# Altium PCB HW1PCB1.PcbDoc
Units mm, origin at the board's own origin, x right, y up, seen from the top; angles counter-clockwise.
Board outline 50.04 x 50.93 mm, 2 copper layers (Top Layer, Bottom Layer); 28 components, 19 nets, 123 pads, 13 vias.
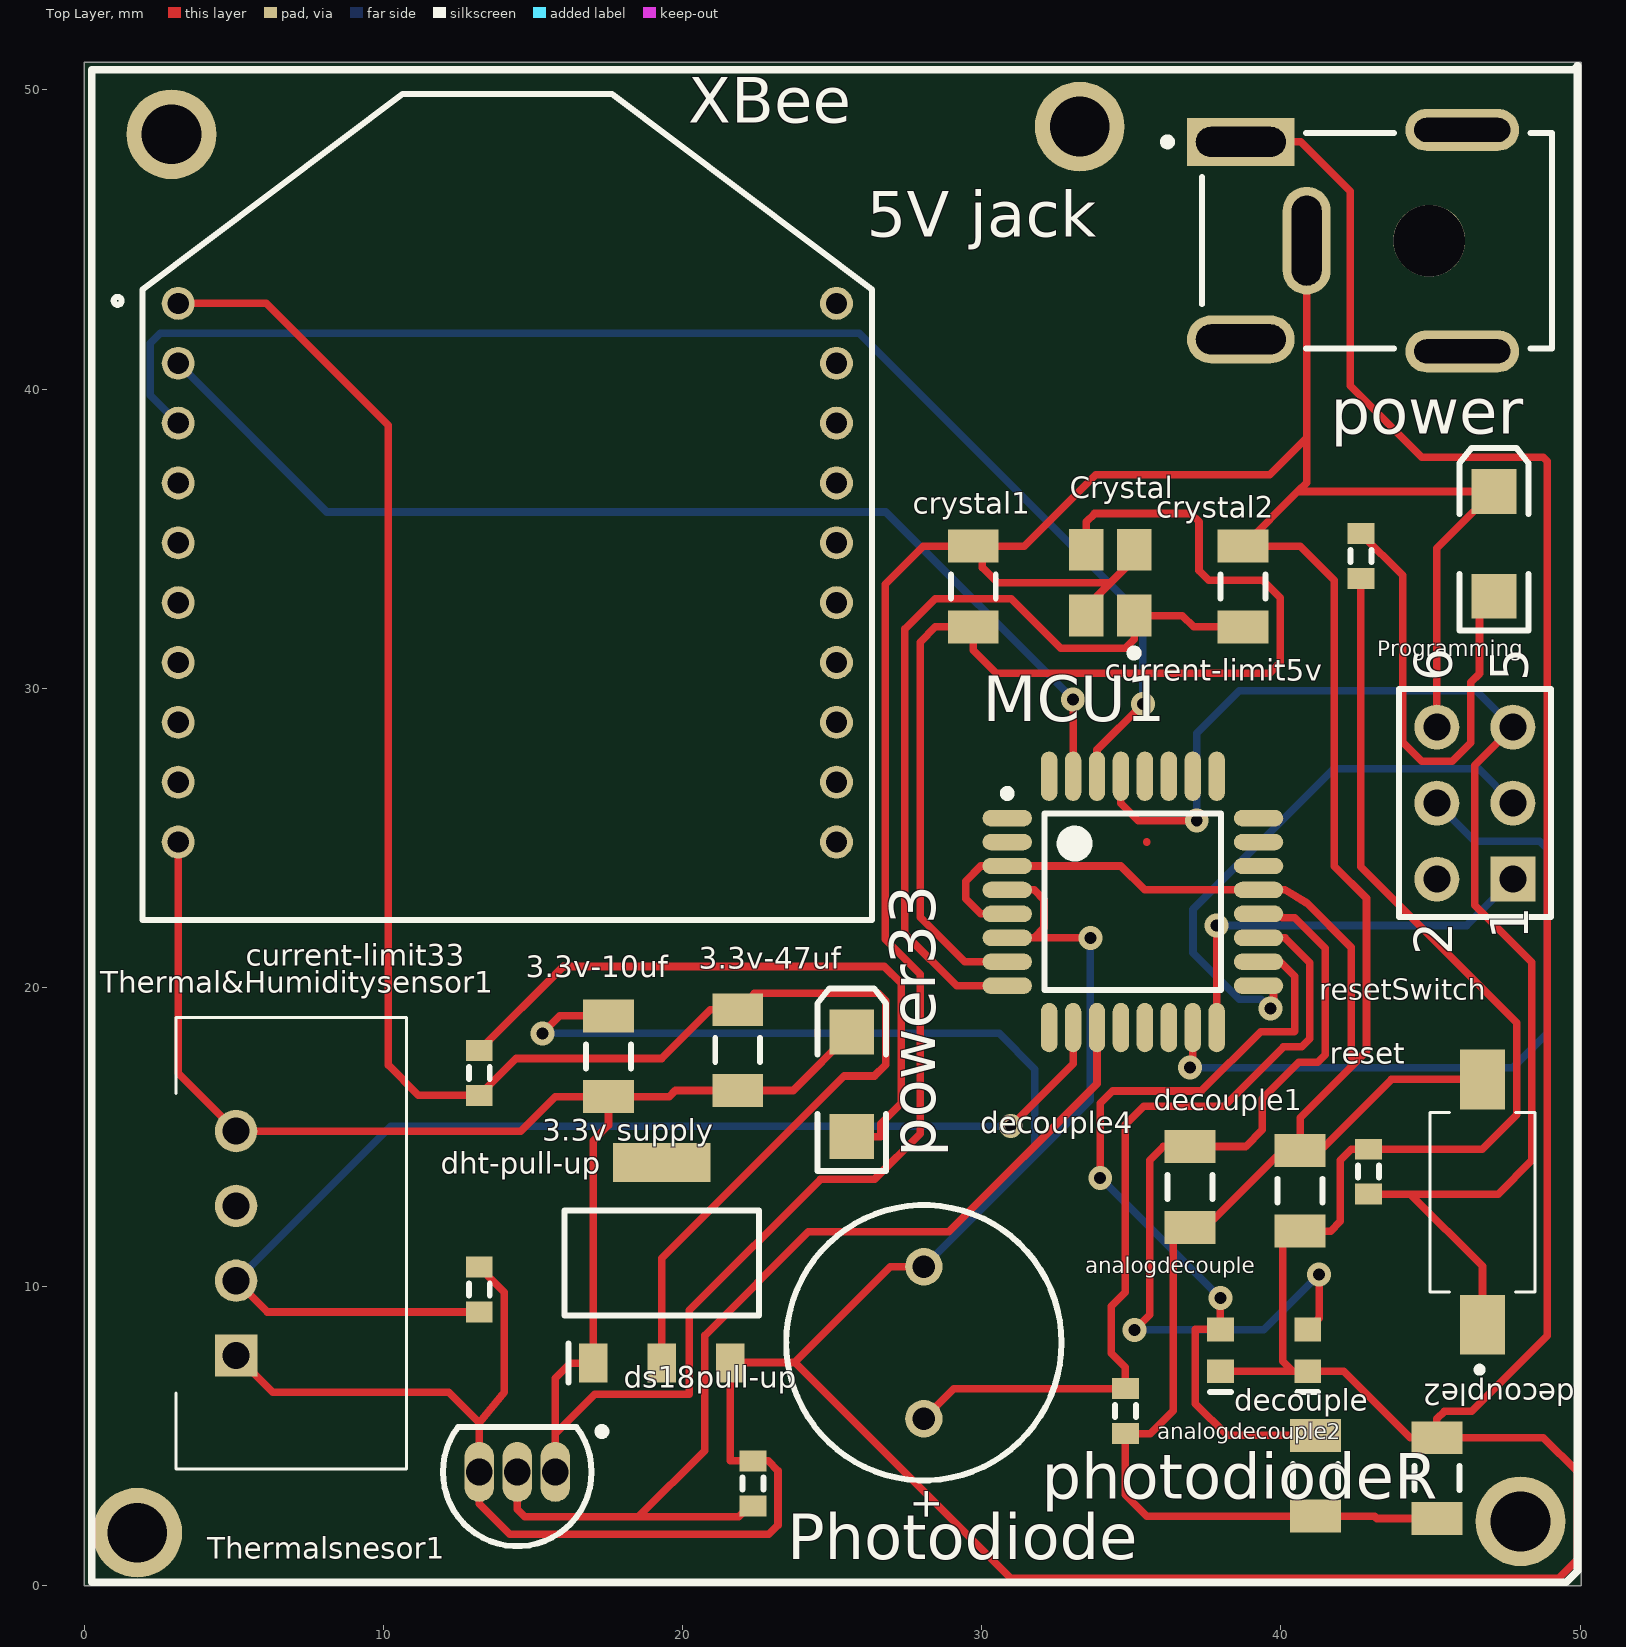
[diagram p0: Top Layer view]
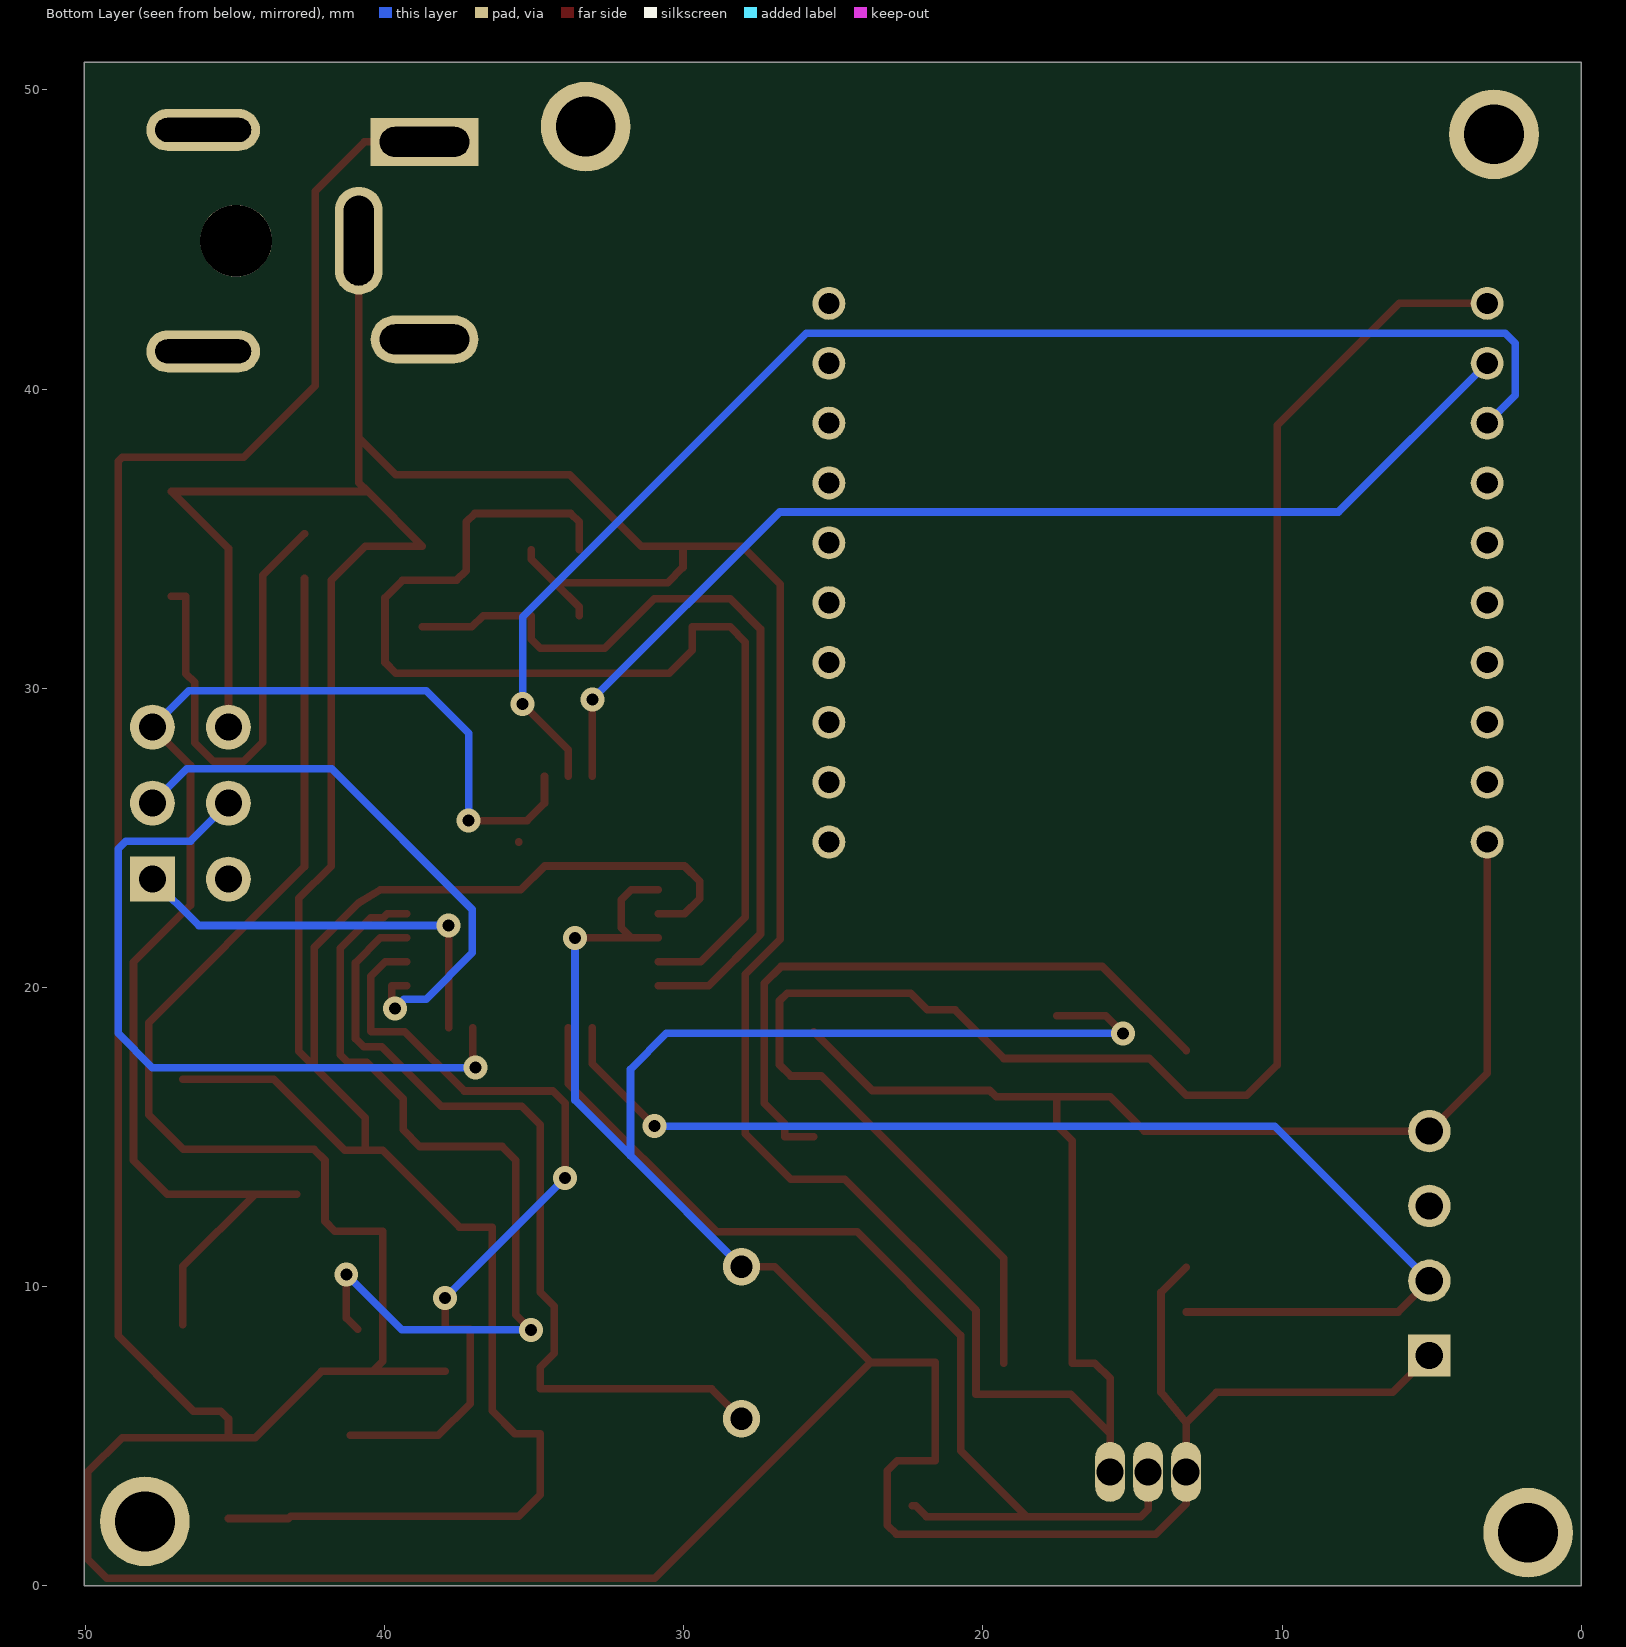
[diagram p1: Bottom Layer view, seen from below]

## Layer stack, top to bottom
Top Solder: solder mask 0.0102, Solder Resist, Dk 3.5
Top Layer: signal copper 0.0356
Dielectric 1: dielectric 0.32, FR-4, Dk 4.8
Bottom Layer: signal copper 0.0356
Bottom Solder: solder mask 0.0102, Solder Resist, Dk 3.5

## Board outline
0,0 0,50.927 50.038,50.927 50.038,50.419 50.038,49.53 50.038,0

## Design rules (kind name [scope] priority, off if disabled: settings)
Clearance [All] p1: gap=0.254 ignorepadtopadclearanceinfootprint=FALSE except(0: Arc-Hole Track-Hole SMDPad-Hole THPad-Hole Via-Hole Fill-Hole Poly-Hole Region-Hole Text-Hole; 0.1: SMDPad-SMDPad)
PolygonConnect [All] p1: connectstyle=Relief reliefconductorwidth=0.254 reliefentries=4 polygonreliefangle="90 Angle" airgapwidth=0.254
RoomDefinition HW1 [InComponentClass('HW1')] p1: confinementstyle=ConfineIn formatcopy=TRUE lockcomponents=FALSE outline 0,0.254 50.038,0.254 50.038,50.8 0,50.8
RoutingVias [All] p1: holewidth=0.4 width=0.8 viastyle="Through Hole" minholewidth=0.2 minwidth=0.4 maxholewidth=6 maxwidth=6.2
SolderMaskExpansion [All] p1: expansion=0.102 istentingtop=FALSE
Width [All] p1: maxlimit=0.254 minlimit=0.254 preferedwidth=0.254
30 further rules are at their usual default settings.

## Components (designator, comment, footprint, x,y, rotation, side; value= is the part's Value field where it differs from the comment)
"3.3v supply" "AMS1117-3.3" SOT229P700X180-4N 19.304,10.795 r90 top
3.3v-10uf "Cap Semi" C1206 17.526,17.7 r90 top value=10uF
3.3v-47uf "Cap Semi" C1206 21.844,17.907 r90 top value=47uF
"5V jack" "PJ-047A" FP-PJ-047A-MFG 43.208,44.958 r270 top
analogdecouple "Inductor" INDC1608L 37.973,7.874 r90 top value=10uH
analogdecouple2 "Inductor" INDC1608L 40.894,7.874 r90 top value=10uH
Crystal "TSX-3225 16.0000MF18X-AC3" EPSON-TSX-3225_V 34.29,33.528 r90 top
crystal1 "Cap Semi" C1206 29.718,33.401 r90 top value=22uF
crystal2 "Cap Semi" C1206 38.735,33.401 r90 top value=22uF
current-limit5v "Res3" J1-0603 42.672,34.417 r90 top value=330
current-limit33 "Res3" J1-0603 13.208,17.145 r90 top value=330
decouple "" C1206 41.148,3.683 r90 top value=100nF
decouple1 "" C1206 40.64,13.208 r90 top value=100nF
decouple2 "" C1206 45.212,3.603 r270 top value=100nF
decouple4 "" C1206 36.957,13.335 r90 top value=100nF
dht-pull-up "Res3" J1-0603 13.208,9.906 r90 top value=10K
ds18pull-up "Res3" J1-0603 22.352,3.429 r90 top value=4.7K
MCU1 "ATmega328P-AU" 32A_N 35.052,22.86 r0 top
Photodiode "BPW21R" VISH-BPW21R-2 28.067,8.128 r90 top
photodiodeR "Res3" J1-0603 34.798,5.842 r90 top value=10K
power "LED2" 3.2X1.6X1.1 47.117,34.826 r90 top
power33 "LED2" 3.2X1.6X1.1 25.654,16.764 r90 top
Programming "Header 3X2" HDR2X3 47.752,23.622 r90 top
reset "Res3" J1-0603 42.926,13.843 r90 top value=10K
resetSwitch "PTS636_SK43_SMTR_LFS" PTS636SK43SMTRLFS 46.736,12.827 r90 top
Thermal&Humiditysensor1 "DHT22" DHT22 5.08,7.7 r90 top
Thermalsnesor1 "DS18B20+" Q3+1 14.478,3.81 r90 top
XBee "XB24CZ7PIT-004" XB24CAPIT-001 14.146,49.861 r0 top

## Footprints (in the part's own frame and the unit in brackets; to place one, negate y for a bottom-side part, rotate by r counter-clockwise, add the part's x,y. Pads: shape width x height; smd on the part's side, far side on the other; paste and mask are expansions set on the pad)
3.2X1.6X1.1 [mm] "SMT LED; 2 Flat Leads"
  rect 1.5x1.5 smd: 1(-1.75,0) 2(1.75,0)
  silkscreen extent -2.9,-1.15 3.2,1.15
32A_N [mm] "Thin QFP, 32-Leads, Body 7x7mm, Pitch 0.8mm, IPC Medium Density"
  oval 1.65x0.55 smd: 1(-4.2,2.8) 2(-4.2,2) 3(-4.2,1.2) 4(-4.2,0.4) 5(-4.2,-0.4) 6(-4.2,-1.2) 7(-4.2,-2) 8(-4.2,-2.8) 17(4.2,-2.8) 18(4.2,-2) 19(4.2,-1.2) 20(4.2,-0.4) 21(4.2,0.4) 22(4.2,1.2) 23(4.2,2) 24(4.2,2.8)
  oval 0.55x1.65 smd: 9(-2.8,-4.2) 10(-2,-4.2) 11(-1.2,-4.2) 12(-0.4,-4.2) 13(0.4,-4.2) 14(1.2,-4.2) 15(2,-4.2) 16(2.8,-4.2) 25(2.8,4.2) 26(2,4.2) 27(1.2,4.2) 28(0.4,4.2) 29(-0.4,4.2) 30(-1.2,4.2) 31(-2,4.2) 32(-2.8,4.2)
  silkscreen extent -4.32,-2.95 2.95,3.75, body extent -3.5,-3.5 3.5,3.5, height 1.2
C1206 [mm] "Chip Capacitor, Body 3.2x1.6mm, IPC High Density"
  rect 1.1x1.7 smd: 1(-1.35,0) 2(1.35,0)
  silkscreen extent -0.4,-0.75 0.4,0.75, body extent -1.7,-0.9 1.7,0.9, height 1.3
DHT22 [mm]
  rect 1.416x1.416 hole 0.91: 1(0,0)
  round 1.416 hole 0.91: 2(2.5,0) 3(5,0) 4(7.5,0)
  silkscreen extent -3.8,-5.7 11.3,2, body extent -3.8,-5.7 11.3,2, height 25.2
EPSON-TSX-3225_V [mm] "SMD, 4-Leads, Body 3.2x2.5mm"
  rect 1.4x1.15 smd: 1(-1.1,-0.8) 2(1.1,-0.8) 3(1.1,0.8) 4(-1.1,0.8)
  silkscreen extent -2.47,-0.93 -2.23,-0.68, body extent -1.6,-1.25 1.6,1.25, height 0.6
FP-PJ-047A-MFG [mm]
  rect 1.6x3.6 hole 3 slot 1 at 0 deg paste-1000 mask+0: 1(-3.3,-4.55)
  rrect100% 3.6x1.6 hole 1 slot 3 at 0 deg paste-1000 mask+0: 2(0,-2.35)
  rrect100% 1.6x3.6 hole 3 slot 1 at 0 deg paste-1000 mask+0: 3(3.3,-4.55)
  rrect100% 1.4x3.8 hole 3.2 slot 0.8 at 0 deg paste-1000 mask+0: 4(3.7,2.85) 5(-3.7,2.85)
  round 2.4 hole 2.4 unplated paste-1000 mask+0: ""(0,1.75)
  silkscreen extent -3.6,-7.12 3.6,5.85, body extent -4.5,-6.45 4.5,5.95, height 0.25
HDR2X3 [mm] "Connector; Header; 3x2 Position"
  rect 1.5x1.5 hole 0.9: 1(0,0)
  round 1.5 hole 0.9: 2(0,2.54) 3(2.54,0) 4(2.54,2.54) 5(5.08,0) 6(5.08,2.54)
  silkscreen extent -1.27,-1.27 6.35,3.81
INDC1608L [mm] "Chip Inductor, Body 1.6x0.8mm, IPC High Density"
  rect 0.8x0.9 smd: 1(-0.7,0) 2(0.7,0)
  silkscreen extent -1.4,-0.35 -1.4,0.35, body extent -0.87,-0.48 0.87,0.48, height 0.55
J1-0603 [mm] "Chip Resistor, Body 1.6x0.8mm, IPC High Density"
  rect 0.7x0.9 smd: 1(-0.75,0) 2(0.75,0)
  silkscreen extent -0.2,-0.35 0.2,0.35, body extent -0.85,-0.48 0.85,0.48, height 0.9
PTS636SK43SMTRLFS [mm]
  rect 2x1.5 smd: 1(-4.1,0) 2(4.1,0)
  silkscreen extent -5.7,-1.75 3,1.75
Q3+1 [mm] "TO, Flat Index; 3 In-Line, Axial Leads; Body Dia. 4.7mm; Leads 0.56 x 0.51 mm (max)"
  oval 2x1 hole 0.9: 1(0,-1.27) 2(0,0) 3(0,1.27)
  silkscreen extent -2.48,-2.96 1.5,2.48, body extent -2.48,-2.5 1.5,2.5, height 4.96
SOT229P700X180-4N [mm]
  rect 1.3x0.95 smd: 1(-3.35,2.29) 2(-3.35,0) 3(-3.35,-2.29)
  rect 1.3x3.25 smd: 4(3.35,0)
  silkscreen extent -4,-3.25 1.75,3.25, body extent -3.5,-3.25 3.5,3.25, height 1.8
VISH-BPW21R-2 [mm] "THD, 2-Leads, Dia 9.2mm, Height 3.3mm, Pin Spacing 5.08mm"
  round 1.25 hole 0.75: 1(-2.54,0) 2(2.54,0)
  silkscreen extent -4.6,-4.6 4.6,4.6, body extent -4.6,-4.6 4.6,4.6, height 3.3
XB24CAPIT-001 [mm]
  round 1.1 hole 0.71: 1(-11,-7) 2(-11,-9) 3(-11,-11) 4(-11,-13) 5(-11,-15) 6(-11,-17) 7(-11,-19) 8(-11,-21) 9(-11,-23) 10(-11,-25) 11(11,-25) 12(11,-23) 13(11,-21) 14(11,-19) 15(11,-17) 16(11,-15) 17(11,-13) 18(11,-11) 19(11,-9) 20(11,-7)
  silkscreen extent -13.16,-27.61 12.19,0

## Part data
"3.3v supply": "Integrated Circuit", Manufacturer_Name="Advanced Monolithic Systems", Datasheet Link=http://www.advanced-monolithic.com/pdf/ds1117.pdf, Height=1.8mm, Manufacturer_Part_Number=AMS1117-3.3
3.3v-10uf 3.3v-47uf crystal1 crystal2: "Capacitor (Semiconductor SIM Model)", LatestRevisionDate=29-May-2009, LatestRevisionNote="IPC-7351 Footprint Added.", PackageDescription="Chip Capacitor", PackageReference=C1206, Published=8-Jun-2000, Publisher="Altium Limited"
"5V jack": library part CMP-14830-000005-1, "CONN PWR JACK 2X5.5MM SOLDER", Current Rating=2.5A, Manufacturer="CUI Inc", Temperature="-25°C to +85°C", Temperature Range High=+85°C, Temperature Range Low=-25°C, Voltage Rating=24V, Automotive=No, Category=Conn, ComponentLink2Description=Datasheet, ComponentLink2URL=https://www.cui.com/product/resource/pj-047a.pdf, Conn Gender=Male, Conn Orientation="Right Angle", Contact Material=Tin,Nickel, Device Class L1=Connectors, Device Class L2="Power Connectors", Device Class L3=unset, Digikey Description="CONN PWR JACK 2X5.5MM SOLDER", Height=9.7mm, Lead Free=Yes, Manufacturer Part Number=PJ-047A, Mouser Description="2.0 x 6.0 mm, 2.5 A, Horizontal, Through Hole, Shielded, Dc Power Jack Connector", Number Of Contacts=3, Octopart=https://octopart.com/pj-047a-cui-19052783, Package=PJ-047A, RoHS=TRUE, Shielding=true
Crystal: library part CMP-2000-07332-1, "MHz Range Crystal Unit, 16 MHz, -40 to 85 degC, 4-Pin SMD, RoHS, Tape and Reel", Frequency=16MHz, Frequency Stability=10PPM, Load Capacitance=9pF, Manufacturer=Epson, Operating Temperature Range=-40Cto+85C, Package / Case=3.2mmx2.5mm, Package Description="4-Pin Surface Mount Device, Body 3.2 x 2.5 mm", Package Reference=TSX-3225, Brand=EpsonTiming, Datasheet URL=https://support.epson.biz/td/api/doc_check.php?dl=brief_FA-238V_en.pdf, Datasheet Version=12/2015, Drive Level=200uW, ESR=60Ohms, Factory Pack Quantity=250, Height=0.6mm, Length=3.2mm, Manufacturer URL=https://www.eea.epson.com/, Mounting Style=SMD/SMT, Mounting Technology=SurfaceMount, Packaging=Reel, Product Category=Crystals, RoHS=True, Series=TSX-3225, Termination Style=SMD/SMT, Tolerance=10PPM, Type=Crystal, Unit Weight=0.000564oz, Width=2.5mm
current-limit5v current-limit33 dht-pull-up ds18pull-up photodiodeR reset: "Resistor", LatestRevisionDate=29-May-2009, LatestRevisionNote="IPC-7351 Footprint Added.", PackageDescription="Chip Resistor", PackageReference=J1-0603, Published=8-Jun-2000, Publisher="Altium Limited"
decouple decouple1 decouple2 decouple4: library part "Cap Semi", "Capacitor (Semiconductor SIM Model)", LatestRevisionDate=29-May-2009, LatestRevisionNote="IPC-7351 Footprint Added.", PackageDescription="Chip Capacitor", PackageReference=C1206, Published=8-Jun-2000, Publisher="Altium Limited"
MCU1: library part CMP-0095-00269-2, "8-bit AVR Microcontroller, 32KB Flash, 1KB EEPROM, 2KB SRAM, 32-pin TQFP, Industrial Grade (-40°C to 85°C)", Code_JEDEC=MS-026-ABA, ComponentLink1Description="Manufacturer URL", ComponentLink1URL=http://www.atmel.com/, ComponentLink2Description="ATmega48A/48PA/88A/88PA/168A/168PA/328/328P Datasheet", ComponentLink2URL=http://www.atmel.com/dyn/resources/prod_documents/doc8271.pdf, ComponentLink3Description="ATmega48A/48PA/88A/88PA/168A/168PA/328/328P Summary", ComponentLink3URL=http://www.atmel.com/dyn/resources/prod_documents/8271S.pdf, DatasheetVersion="revD, May-2011", PackageDescription="32-Lead, 7x7x1.0 mm Body, 0.8mm Lead Pitch, Thin Profile Plastic Quad Flat Package (TQFP)", PackageReference=32A, PackageVersion="revC, Oct-2010", RevisionNote="DatasheetVersion & PackageVersion updated. URLs added."
Photodiode: library part CMP-2000-05428-1, "Silicon Photodiode, 565 nm, -40 to 125 degC, 2-Pin TO-5, RoHS, Bulk", Dark Current=2000pA, Diode Case Style=TO-5, Manufacturer=Vishay, Operating Temperature Max=125degC, Operating Temperature Min=-40degC, Angle of Half Sensitivity ±=50deg, Automotive Qualification Standard=-, Datasheet URL=https://datasheet.ciiva.com/25620/0900766b80e22c15-25620368.pdf, Datasheet Version="Rev. 1.7, 11/2011", Manufacturer URL=http://www.vishay.com/, MSL=-, No. of Pins=2Pins, Packaging=Each, Product Range=-, SVHC=ToBeAdvised, Wavelength of Peak Sensitivity=565nm
power power33: "Typical RED, GREEN, YELLOW, AMBER GaAs LED", LatestRevisionDate=17-Jul-2002, LatestRevisionNote="Re-released for DXP Platform.", PackageDescription="SM LED; 2 Flat Leads", PackageReference=3.2X1.6X1.1, PackageVersion=Feb-2002, Published=8-Jun-2000, Publisher="Altium Limited"
Programming: "Header, 3-Pin, Dual row", LatestRevisionDate=17-Jul-2002, LatestRevisionNote="Re-released for DXP Platform.", Publisher="Altium Limited"
resetSwitch: "Switch", Arrow Part Number="PTS636 SK43 SMTR LFS", Manufacturer_Name="C & K COMPONENTS", Mouser Part Number=611-PTS636SK43SMTRLF, Arrow Price/Stock=https://www.arrow.com/en/products/pts636-sk43-smtr-lfs/ck, Datasheet Link="https://componentsearchengine.com/Datasheets/1/PTS636 SK43 SMTR LFS.pdf", Height=4.5mm, Manufacturer_Part_Number="PTS636 SK43 SMTR LFS", Mouser Price/Stock=https://www.mouser.co.uk/ProductDetail/CK/PTS636-SK43-SMTR-LFS?qs=vLWxofP3U2wsQpQ593zsYw%3D%3D
Thermal&Humiditysensor1: "Integrated Circuit", Manufacturer_Name="Aosong Electronics", Datasheet Link=https://datasheet4u.com/datasheet-parts/DHT22-datasheet.php?id=792211, Height=25.1mm, Manufacturer_Part_Number=DHT22
Thermalsnesor1: library part CMP-0253-00003-1, "Programmable Resolution Digital Thermometer, 1-Wire Interface, ±0.5°C Accuracy, 3-Pin TO92, -55°C to +125°C, Pb-Free", Code_JEDEC=TO-226-AA, ComponentLink1Description="Manufacturer URL", ComponentLink1URL=http://www.maxim-ic.com, ComponentLink2Description=Datasheet, ComponentLink2URL=http://datasheets.maxim-ic.com/en/ds/DS18B20.pdf, DatasheetVersion=2007, PackageDescription="TO-92 Package, Body Dia. 4.7mm; Leads 0.51 x 0.51 mm (max), Pb-Free", PackageReference=Q3+1, PackageVersion="revB, 2009"
XBee: "Integrated Circuit", Manufacturer_Name="Digi International", Mouser Part Number=888-XB24CZ7PIT-004, Arrow Part Number=XB24CZ7PIT-004, Arrow Price/Stock=https://www.arrow.com/en/products/xb24cz7pit-004/digi-international, Datasheet Link=http://www.digi.com/pdf/ds_xbee_zigbee.pdf, Manufacturer_Part_Number=XB24CZ7PIT-004, Mouser Price/Stock=https://www.mouser.com/Search/Refine.aspx?Keyword=888-XB24CZ7PIT-004
analogdecouple analogdecouple2: Code_IEC=1005, Code_JEITA=0402, LatestRevisionDate=29-May-2009, LatestRevisionNote="IPC-7351 Footprint Added.", PackageDescription="Chip Inductor", PackageReference=0402-A, Published=8-Jun-2000, Publisher="Altium Limited"

## Free pads (board coordinates)
  round 3 hole 2: 2(2.921,48.514) 3(1.778,1.778) 4(48.006,2.159) 5(33.274,48.768)

## Via types
v1: diameter 0.8, hole 0.4, Top Layer to Bottom Layer, 13 vias

## Nets (pads, with @x,y where several pads share a name; then routed paths per layer and width w, separated by ;. In a path a pad name is that pad's centre, name@x,y a point inside that pad or via, vN(x,y) a via of type N, cw(c..) or ccw(c..) an arc to the next point about the centre after c; other vN are vias at no path point)
3.3V: 3.3v-47uf.2 "3.3v supply.2" current-limit33.1 XBee.1 | length 64.5
  Top Layer w0.254: XBee.1 6.085,42.861 10.16,38.786 10.16,17.411 11.176,16.395 current-limit33.1 14.441,17.628 19.304,17.628 20.933,19.257 3.3v-47uf.2 21.852,19.257 22.407,19.812 26.543,19.812 26.797,19.558 26.797,17.424 26.416,17.043 25.4,17.043 19.304,10.947 19.304,7.445
5V: 3.3v-10uf.2 "3.3v supply.3" "5V jack.1" analogdecouple2.1 analogdecouple.1 current-limit5v.1 decouple1.1 decouple2.1 dht-pull-up.2 ds18pull-up.2 MCU1.4 MCU1.6 Photodiode.2 reset.2 Thermal&Humiditysensor1.1 Thermalsnesor1.3 | length 218.3
  Top Layer w0.254: Thermal&Humiditysensor1.1 6.303,6.477 12.192,6.477 13.208,5.461 ; dht-pull-up.2 14.046,9.818 14.046,6.477 13.208,5.461 ; v1(15.316,18.466) 15.9,19.05 3.3v-10uf.2 ; Photodiode.2 26.949,10.668 23.749,7.468 ; MCU1.6 31.75,21.66 ; MCU1.4 31.75,23.26 32.08,22.93 32.08,21.99 31.75,21.66 ; v1(33.63,21.66) 31.75,21.66 ; analogdecouple.1 40.386,7.174 ; 38.658,48.258 40.665,48.258 42.316,46.607 42.316,40.107 44.704,37.719 48.768,37.719 48.895,37.592 48.895,8.357 46.38,5.842 45.466,5.842 45.212,5.588 decouple2.1 ; current-limit5v.1 42.672,24.028 47.879,18.821 47.879,15.748 46.724,14.593 reset.2 42.355,14.593 41.986,14.224 41.986,12.188 41.656,11.858 decouple1.1 40.056,11.858 40.056,7.504 40.386,7.174 ; 13.208,5.461 Thermalsnesor1.3 13.208,2.743 14.224,1.727 22.885,1.727 23.19,2.032 23.19,3.849 22.86,4.179 ds18pull-up.2 21.594,4.179 21.594,7.445 21.594,7.468 23.749,7.468 ; 23.749,7.468 30.963,0.254 49.276,0.254 49.911,0.889 49.911,3.81 48.768,4.953 decouple2.1 ; 40.386,7.174 analogdecouple2.1 42.102,7.174 44.323,4.953 decouple2.1
  Bottom Layer w0.254: v1(15.316,18.466) 30.582,18.466 31.775,17.272 31.775,14.376 ; Photodiode.2 31.775,14.376 ; v1(33.63,21.66) 33.63,16.231 31.775,14.376
ADC6: MCU1.19 Photodiode.1 photodiodeR.2 | length 28.3
  Top Layer w0.254: Photodiode.1 29.071,6.592 photodiodeR.2 34.798,7.303 34.322,7.779 34.322,9.341 34.798,9.817 34.798,15.418 35.414,16.034 38.104,16.034 40.085,18.015 40.693,18.015 40.966,18.288 40.966,20.828 40.134,21.66 MCU1.19
GND: 3.3v-10uf.1 3.3v-47uf.1 "3.3v supply.1" "5V jack.2" crystal1.2 crystal2.2 Crystal.2 Crystal.4 decouple1.2 decouple2.2 decouple4.1 decouple.1 MCU1.3 MCU1.5 MCU1.21 photodiodeR.1 power33.2 power.2 Programming.6 resetSwitch.2 Thermal&Humiditysensor1.4 Thermalsnesor1.1 XBee.10 | length 210.9
  Top Layer w0.254: XBee.10 3.146,17.134 Thermal&Humiditysensor1.4 14.598,15.2 15.748,16.35 3.3v-10uf.1 ; Thermalsnesor1.1 15.748,5.08 ; power33.2 23.697,16.557 3.3v-47uf.1 19.765,16.557 19.558,16.35 3.3v-10uf.1 ; MCU1.5 29.972,22.46 29.464,22.968 29.464,23.552 29.972,24.06 MCU1.3 34.646,24.06 35.446,23.26 MCU1.21 40.132,23.26 40.862,22.824 42.35,21.336 42.35,17.359 ; Crystal.4 33.49,32.715 34.303,33.528 ; Crystal.2 35.09,34.315 34.303,33.528 ; 40.858,44.958 40.858,38.369 ; decouple2.2 43.209,2.253 43.129,2.333 decouple.1 35.513,2.333 34.798,3.048 photodiodeR.1 35.636,5.092 36.398,5.854 36.398,11.985 decouple4.1 37.49,11.985 40.063,14.558 decouple1.2 ; Programming.6 45.212,34.671 power.2 40.56,36.576 ; resetSwitch.2 43.695,16.927 41.326,14.558 decouple1.2 ; 15.748,5.08 15.748,6.937 16.256,7.445 17.014,7.445 17.014,14.88 17.526,15.392 3.3v-10uf.1 ; 15.748,5.08 17.069,6.401 20.23,6.401 20.23,9.206 24.613,13.589 26.416,13.589 27.94,15.113 27.94,20.447 26.772,21.615 26.772,33.477 28.045,34.751 crystal1.2 crystal1.2@30.023,34.751 ; crystal1.2@30.023,34.751 31.42,34.751 33.804,37.135 39.624,37.135 40.858,38.369 ; crystal1.2@30.023,34.751 30.023,34.036 30.531,33.528 34.303,33.528 ; 40.56,36.576 40.858,36.874 40.858,38.369 ; 40.56,36.576 crystal2.2 40.64,34.751 41.783,33.608 41.783,24.054 42.858,22.979 42.858,17.867 42.35,17.359 ; decouple1.2 40.64,15.649 42.35,17.359
MCUDataIn: MCU1.31 XBee.2 | length 37.1
  Top Layer w0.254: MCU1.31 v1(33.052,29.629)
  Bottom Layer w0.254: XBee.2 8.117,35.89 26.79,35.89 v1(33.052,29.629)
MCUDataOut: MCU1.30 XBee.3 | length 46.2
  Top Layer w0.254: MCU1.30 33.852,27.94 v1(35.382,29.47)
  Bottom Layer w0.254: XBee.3 2.21,39.797 2.21,41.529 2.54,41.859 25.908,41.859 35.382,32.385 v1(35.382,29.47)
MISO: MCU1.16 Programming.1 | length 14
  Top Layer w0.254: MCU1.16 v1(37.852,22.073)
  Bottom Layer w0.254: v1(37.852,22.073) 46.203,22.073 Programming.1
MOSI: MCU1.15 Programming.4 | length 24.3
  Top Layer w0.254: v1(36.957,17.323) 37.052,17.418 MCU1.15
  Bottom Layer w0.254: v1(36.957,17.323) 47.752,17.323 48.895,18.466 48.895,24.638 48.641,24.892 46.482,24.892 Programming.4
Netanalogdecouple2_2: analogdecouple2.2 decouple4.2 MCU1.20 | length 29
  Top Layer w0.254: v1(35.103,8.56) 35.611,9.068 35.611,14.228 36.068,14.685 decouple4.2 38.815,14.685 39.37,15.24 39.37,16.284 40.593,17.507 41.221,17.507 41.474,17.76 41.474,21.315 40.462,22.327 40.037,22.327 39.903,22.46 MCU1.20 ; analogdecouple2.2 41.275,8.955 v1(41.275,10.414)
  Bottom Layer w0.254: v1(35.103,8.56) 39.421,8.56 v1(41.275,10.414)
Netanalogdecouple_2: analogdecouple.2 decouple.2 MCU1.18 | length 27.7
  Top Layer w0.254: v1(33.96,13.64) 33.96,16.129 34.373,16.542 37.338,16.542 39.319,18.523 40.439,18.523 40.458,18.542 40.458,20.375 39.973,20.86 MCU1.18 ; v1(37.973,9.627) analogdecouple.2 37.135,8.574 37.135,6.096 38.198,5.033 decouple.2
  Bottom Layer w0.254: v1(33.96,13.64) v1(37.973,9.627)
Netcurrent-limit5v_2: current-limit5v.2 power.1 | length 15.8
  Top Layer w0.254: current-limit5v.2 44.069,33.77 44.069,28.194 44.704,27.559 45.72,27.559 46.343,28.182 46.343,30.201 46.634,30.492 46.634,33.076 power.1
Netcurrent-limit33_2: current-limit33.2 power33.1 | length 21.9
  Top Layer w0.254: current-limit33.2 16.014,20.701 26.746,20.701 27.305,20.142 27.305,16.129 26.619,15.443 26.619,15.014 power33.1
NetProgramming_2: Programming.2
PB6: crystal1.1 Crystal.3 MCU1.7 | length 38
  Top Layer w0.254: MCU1.7 29.432,20.86 27.94,22.352 27.94,31.543 28.448,32.051 crystal1.1 29.718,31.267 30.48,30.505 39.624,30.505 39.98,30.861 39.98,33.02 39.395,33.604 37.592,33.604 37.262,33.934 37.262,35.56 36.982,35.839 33.769,35.839 33.49,35.56 Crystal.3
PB7: crystal2.1 Crystal.1 MCU1.8 | length 27.8
  Top Layer w0.254: MCU1.8 29.159,20.06 27.432,21.787 27.432,31.979 28.448,32.995 30.988,32.995 32.639,31.344 34.798,31.344 35.09,31.636 Crystal.1 36.703,32.428 37.08,32.051 crystal2.1
PD6: dht-pull-up.1 MCU1.10 Thermal&Humiditysensor1.2 | length 40.7
  Top Layer w0.254: Thermal&Humiditysensor1.2 6.124,9.156 dht-pull-up.1 ; v1(30.969,15.367) 33.052,17.45 MCU1.10
  Bottom Layer w0.254: Thermal&Humiditysensor1.2 10.247,15.367 v1(30.969,15.367)
PD7: ds18pull-up.1 MCU1.11 Thermalsnesor1.2 | length 34.8
  Top Layer w0.254: Thermalsnesor1.2 14.478,2.565 14.732,2.311 18.528,2.311 ; ds18pull-up.1 22.25,2.679 21.883,2.311 18.528,2.311 ; MCU1.11 33.852,16.789 28.899,11.836 24.206,11.836 20.738,8.368 20.738,4.521 18.528,2.311
reset: MCU1.29 Programming.5 reset.1 resetSwitch.1 | length 45.3
  Top Layer w0.254: MCU1.29 34.652,26.162 35.236,25.578 v1(37.186,25.578) ; reset.1 44.323,13.093 ; resetSwitch.1 46.736,10.68 44.323,13.093 ; Programming.5 46.482,27.432 46.482,22.745 48.387,20.84 48.387,14.224 47.256,13.093 44.323,13.093
  Bottom Layer w0.254: v1(37.186,25.578) 37.186,28.499 38.608,29.921 46.533,29.921 Programming.5
SCK: MCU1.17 Programming.3 | length 19.2
  Top Layer w0.254: MCU1.17 39.751,20.06 39.751,19.406 v1(39.649,19.304)
  Bottom Layer w0.254: v1(39.649,19.304) 39.345,19.609 38.608,19.609 37.059,21.158 37.059,22.606 41.758,27.305 46.609,27.305 Programming.3
pads on no net: "3.3v supply.4" "5V jack.3" "5V jack.4" "5V jack.5" "5V jack." MCU1.1 MCU1.2 MCU1.9 MCU1.12 MCU1.13 MCU1.14 MCU1.22 MCU1.23 MCU1.24 MCU1.25 MCU1.26 MCU1.27 MCU1.28 MCU1.32 Thermal&Humiditysensor1.3 XBee.4 XBee.5 XBee.6 XBee.7 XBee.8 XBee.9 XBee.11 XBee.12 XBee.13 XBee.14 XBee.15 XBee.16 XBee.17 XBee.18 XBee.19 XBee.20
copper on no net: | length 0
  Top Layer w0.254: 35.509,24.867 35.516,24.86

## Silkscreen, mask and mechanical layers (free items; w line width, h text height)
Top Overlay:
  lines w0.254: 0.254,0.127 49.53,0.127 49.911,0.508 49.911,50.8 49.784,50.673 0.254,50.673 0.254,0.127

## Text inside footprints (layer, text, board x,y; h text height)
Photodiode: Top Overlay "+" at 28.575,2.159 h1 r90
Programming: Top Overlay "6" at 45.72,30.226 h1.27 r90; Top Overlay "5" at 48.26,30.226 h1.27 r90; Top Overlay "2" at 45.72,21.082 h1.27 r90; Top Overlay "1" at 48.26,21.59 h1.27 r90